# Altium PCB CirclePCBV2.PcbDoc
Units mil, origin at the board's own origin, x right, y up, seen from the top; angles counter-clockwise.
Board outline 6015.06 x 6015.03 mil, 4 copper layers (Top Layer, GND Plane, Power Plane, Bottom Layer), stack 38.58 mil thick; 9 components, 31 nets, 90 pads, 38 vias.
Unrouted connection lines stored in the file: 3.
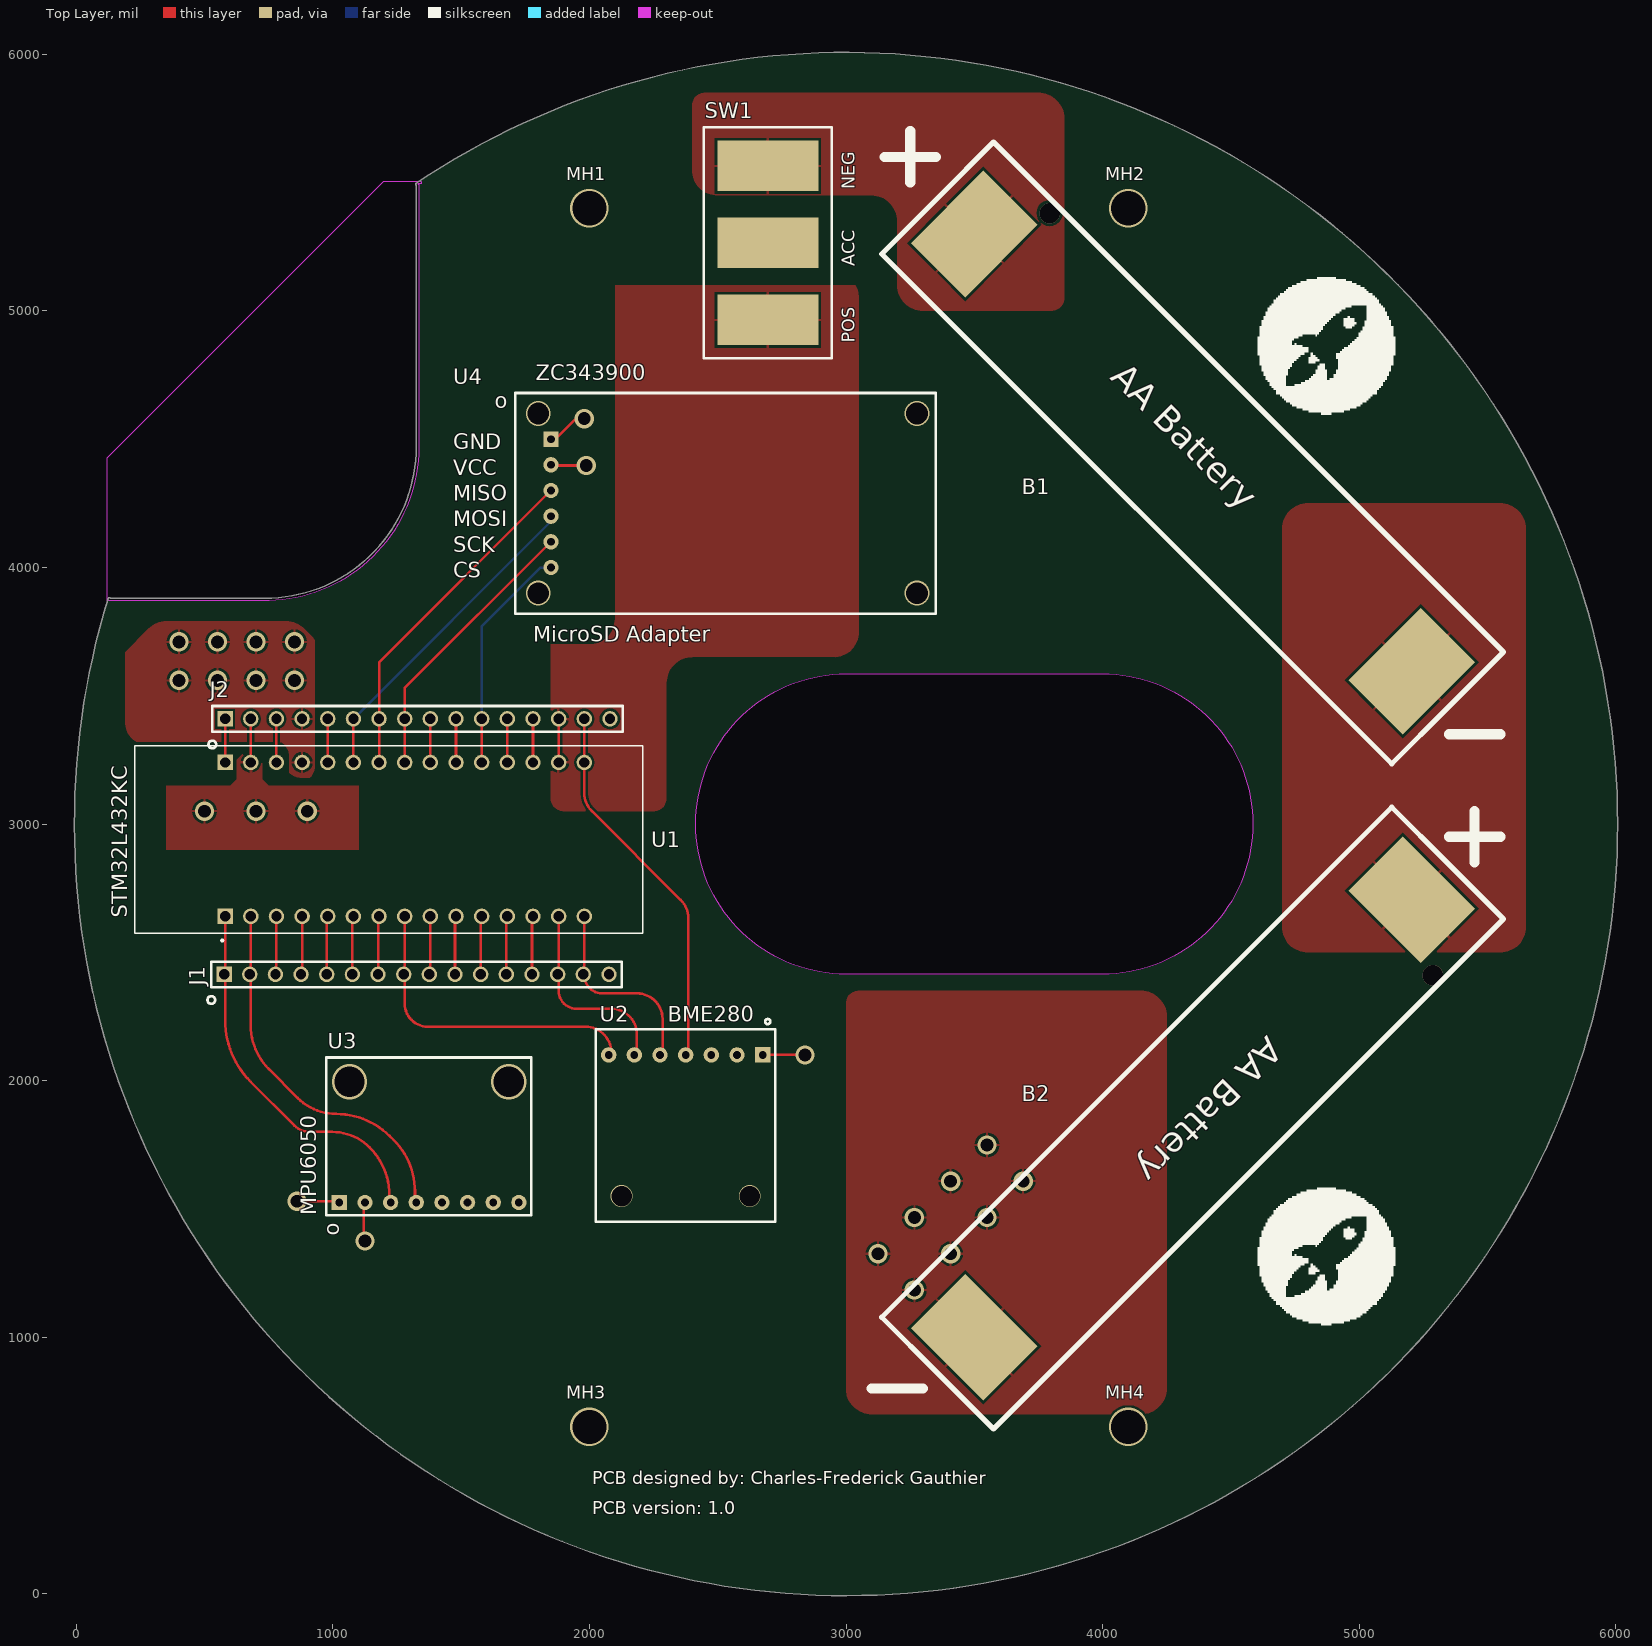
[diagram p0: Top Layer view]
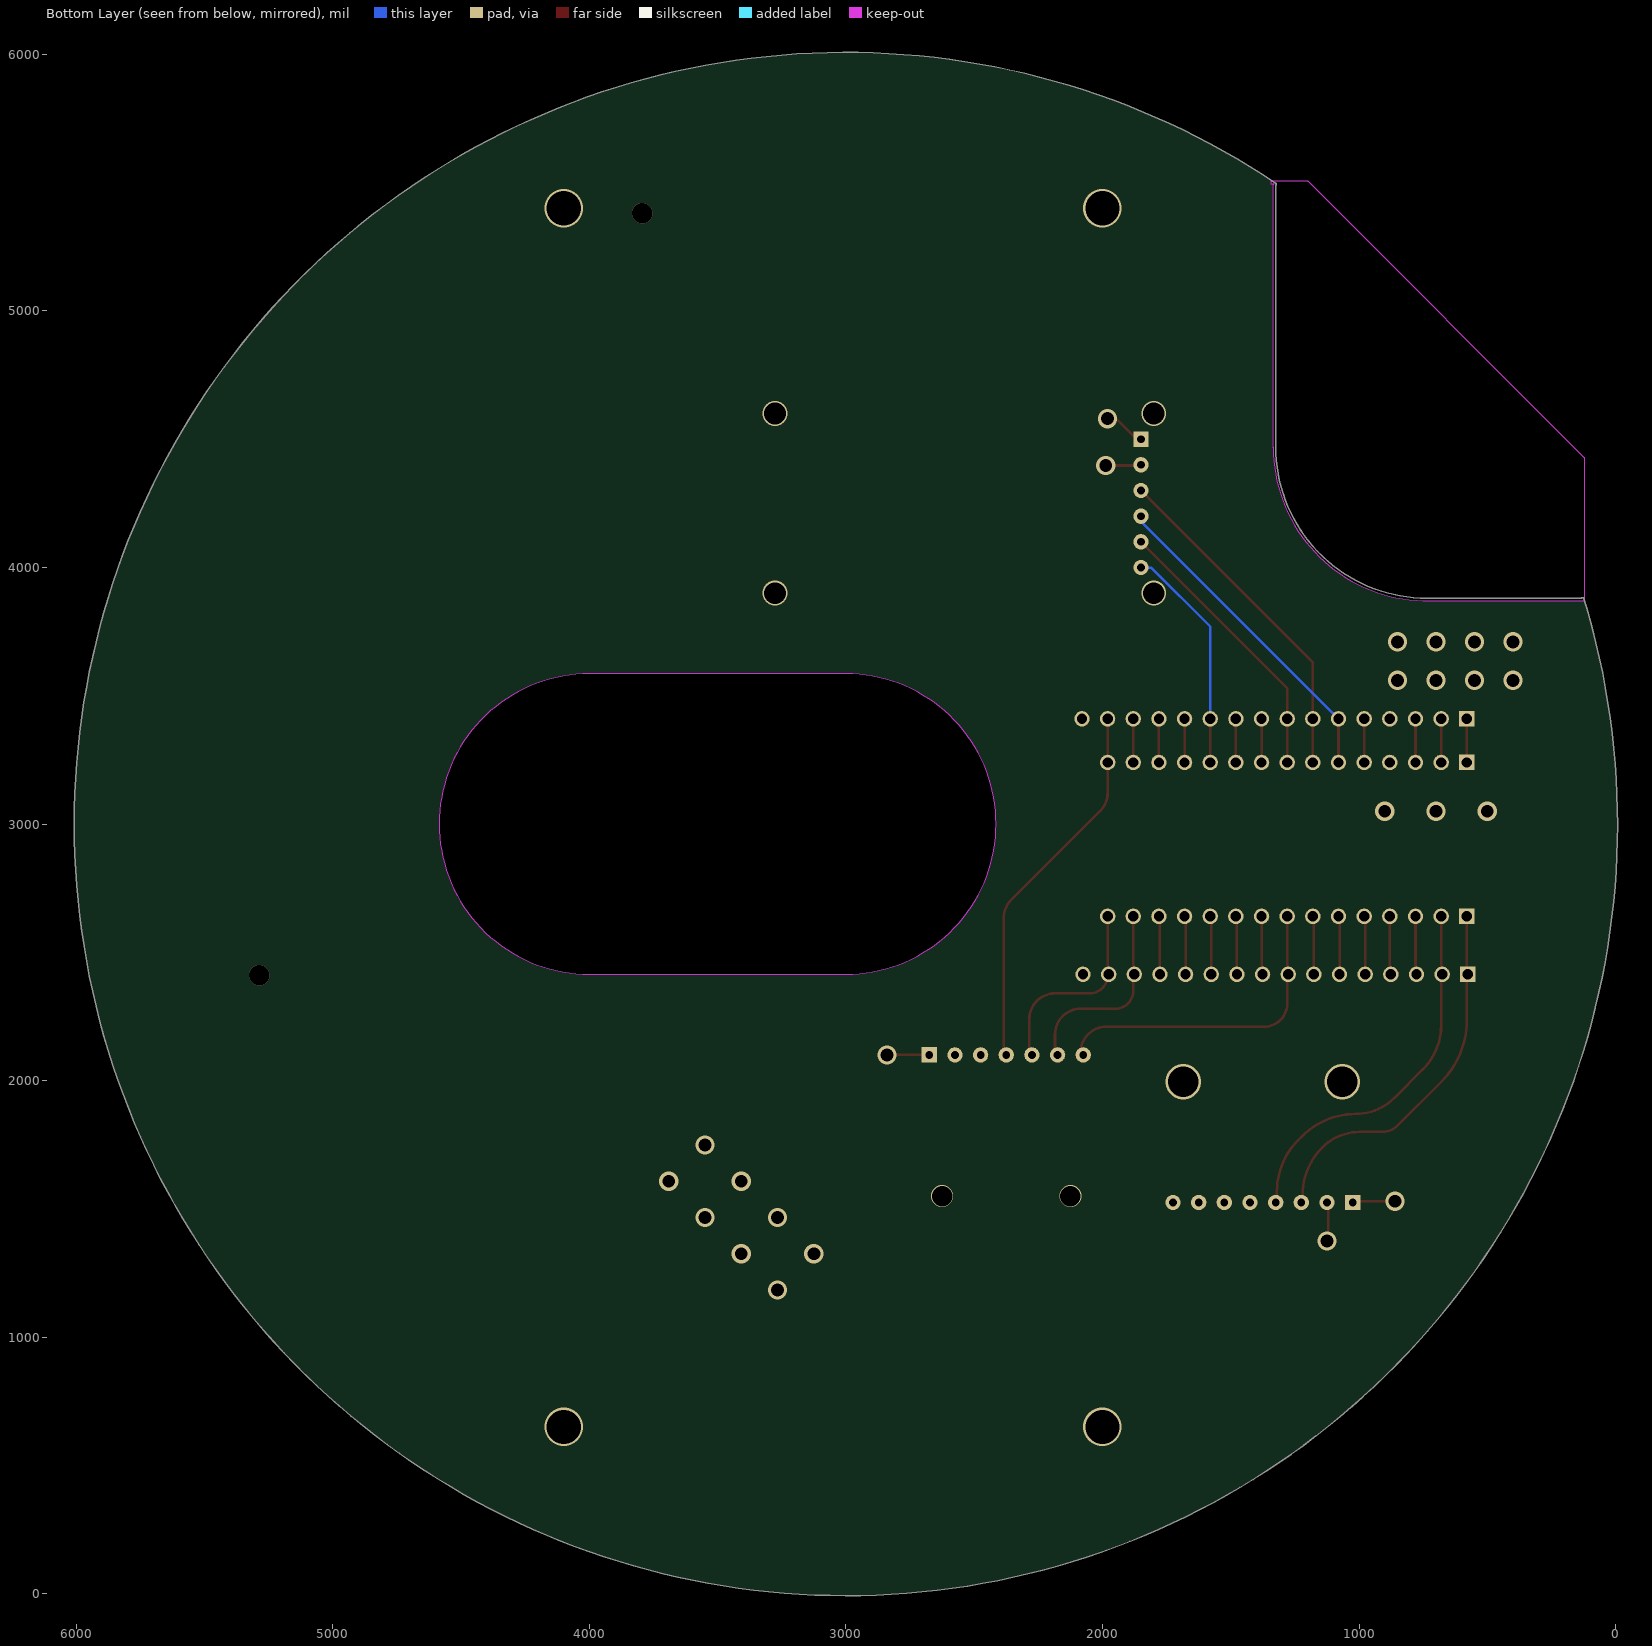
[diagram p1: Bottom Layer view, seen from below]
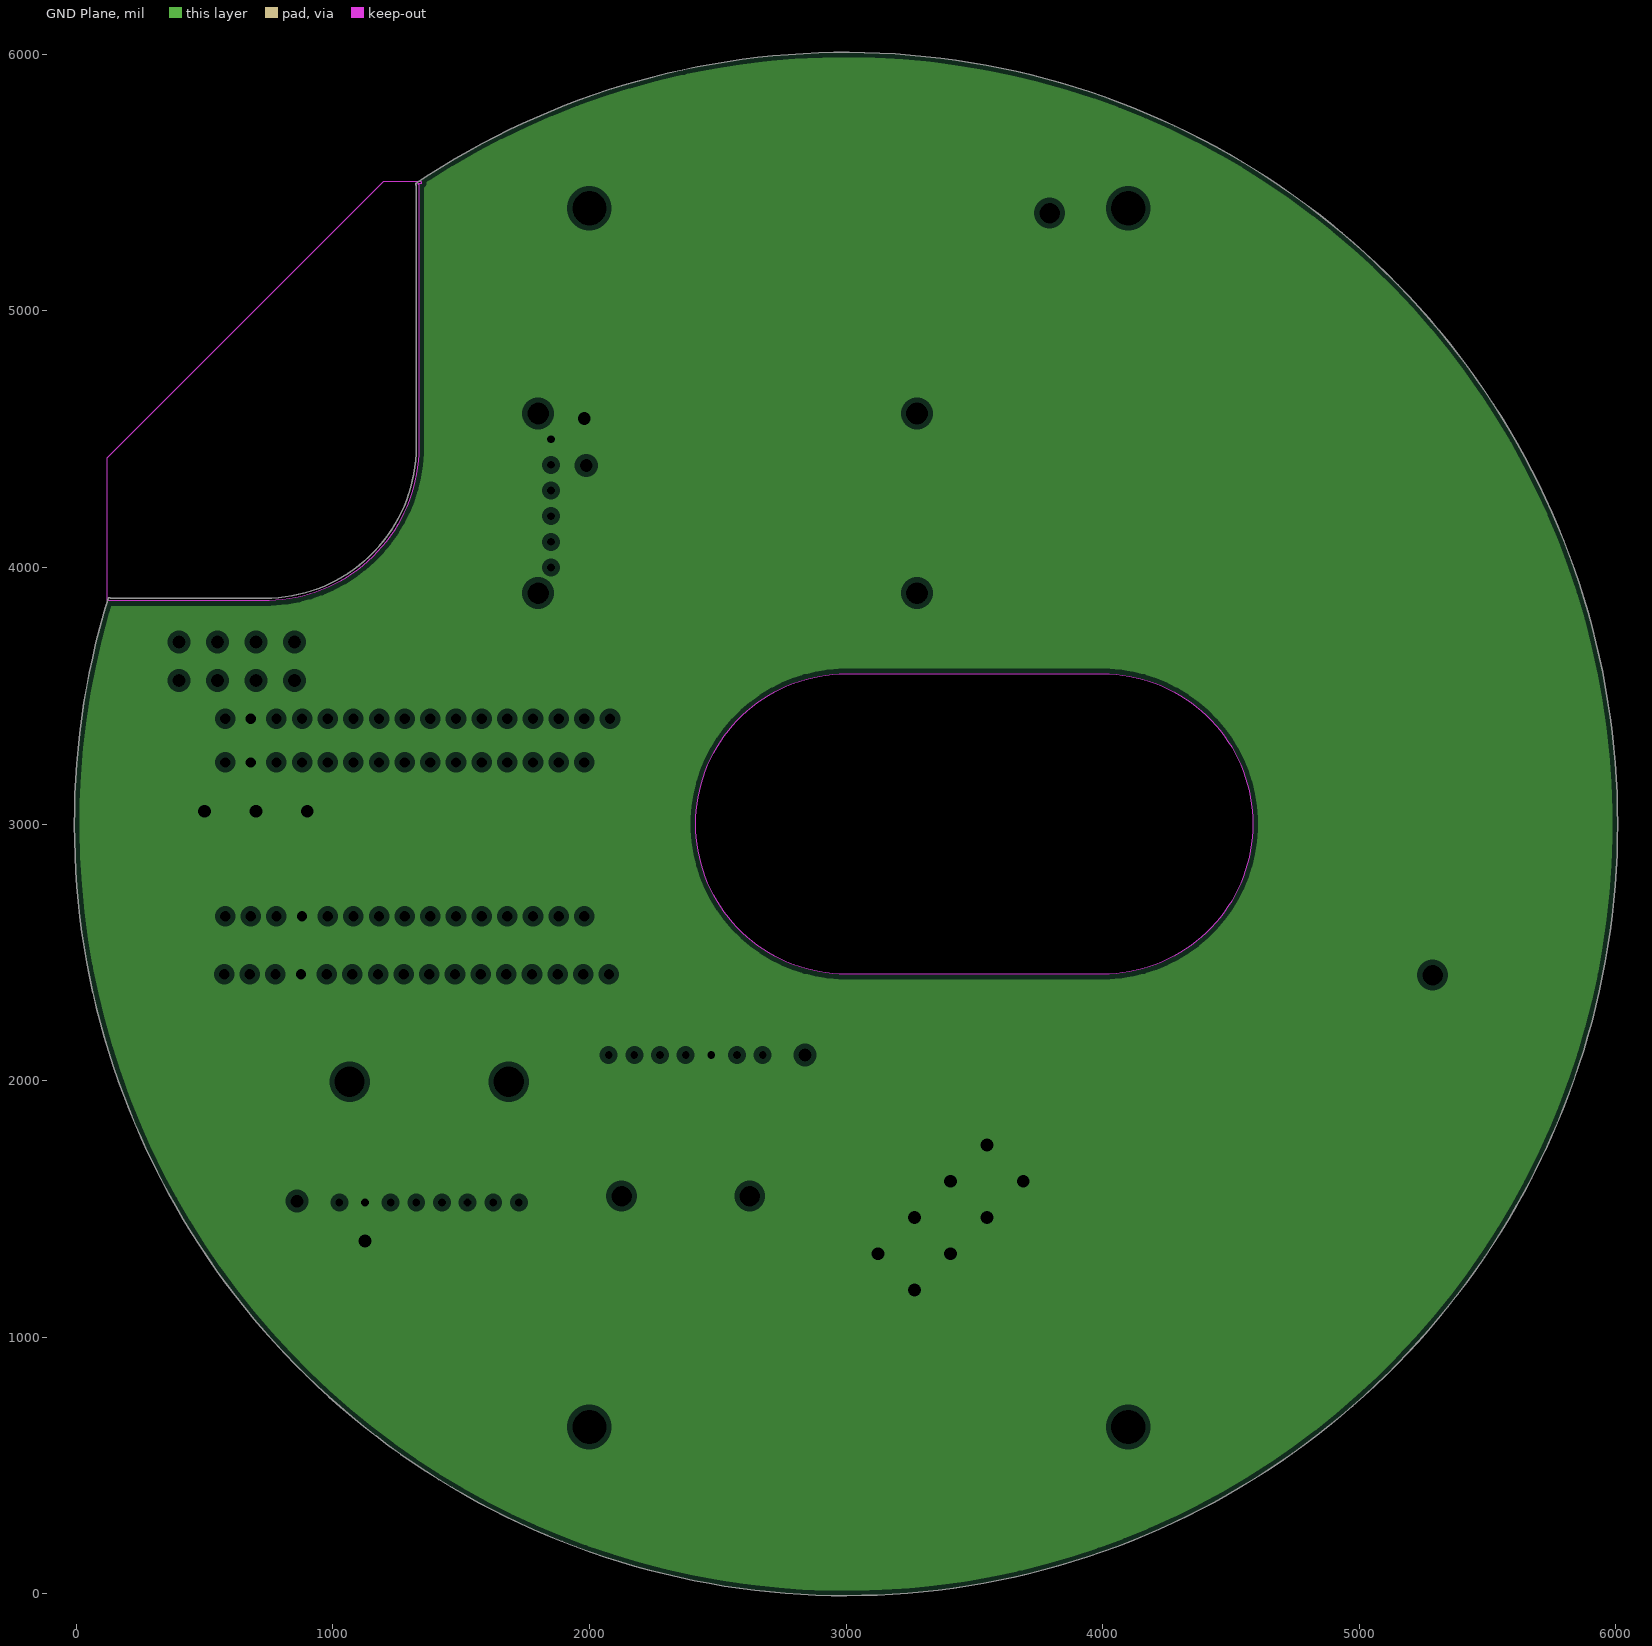
[diagram p2: GND Plane, clearances drawn from the general rule]
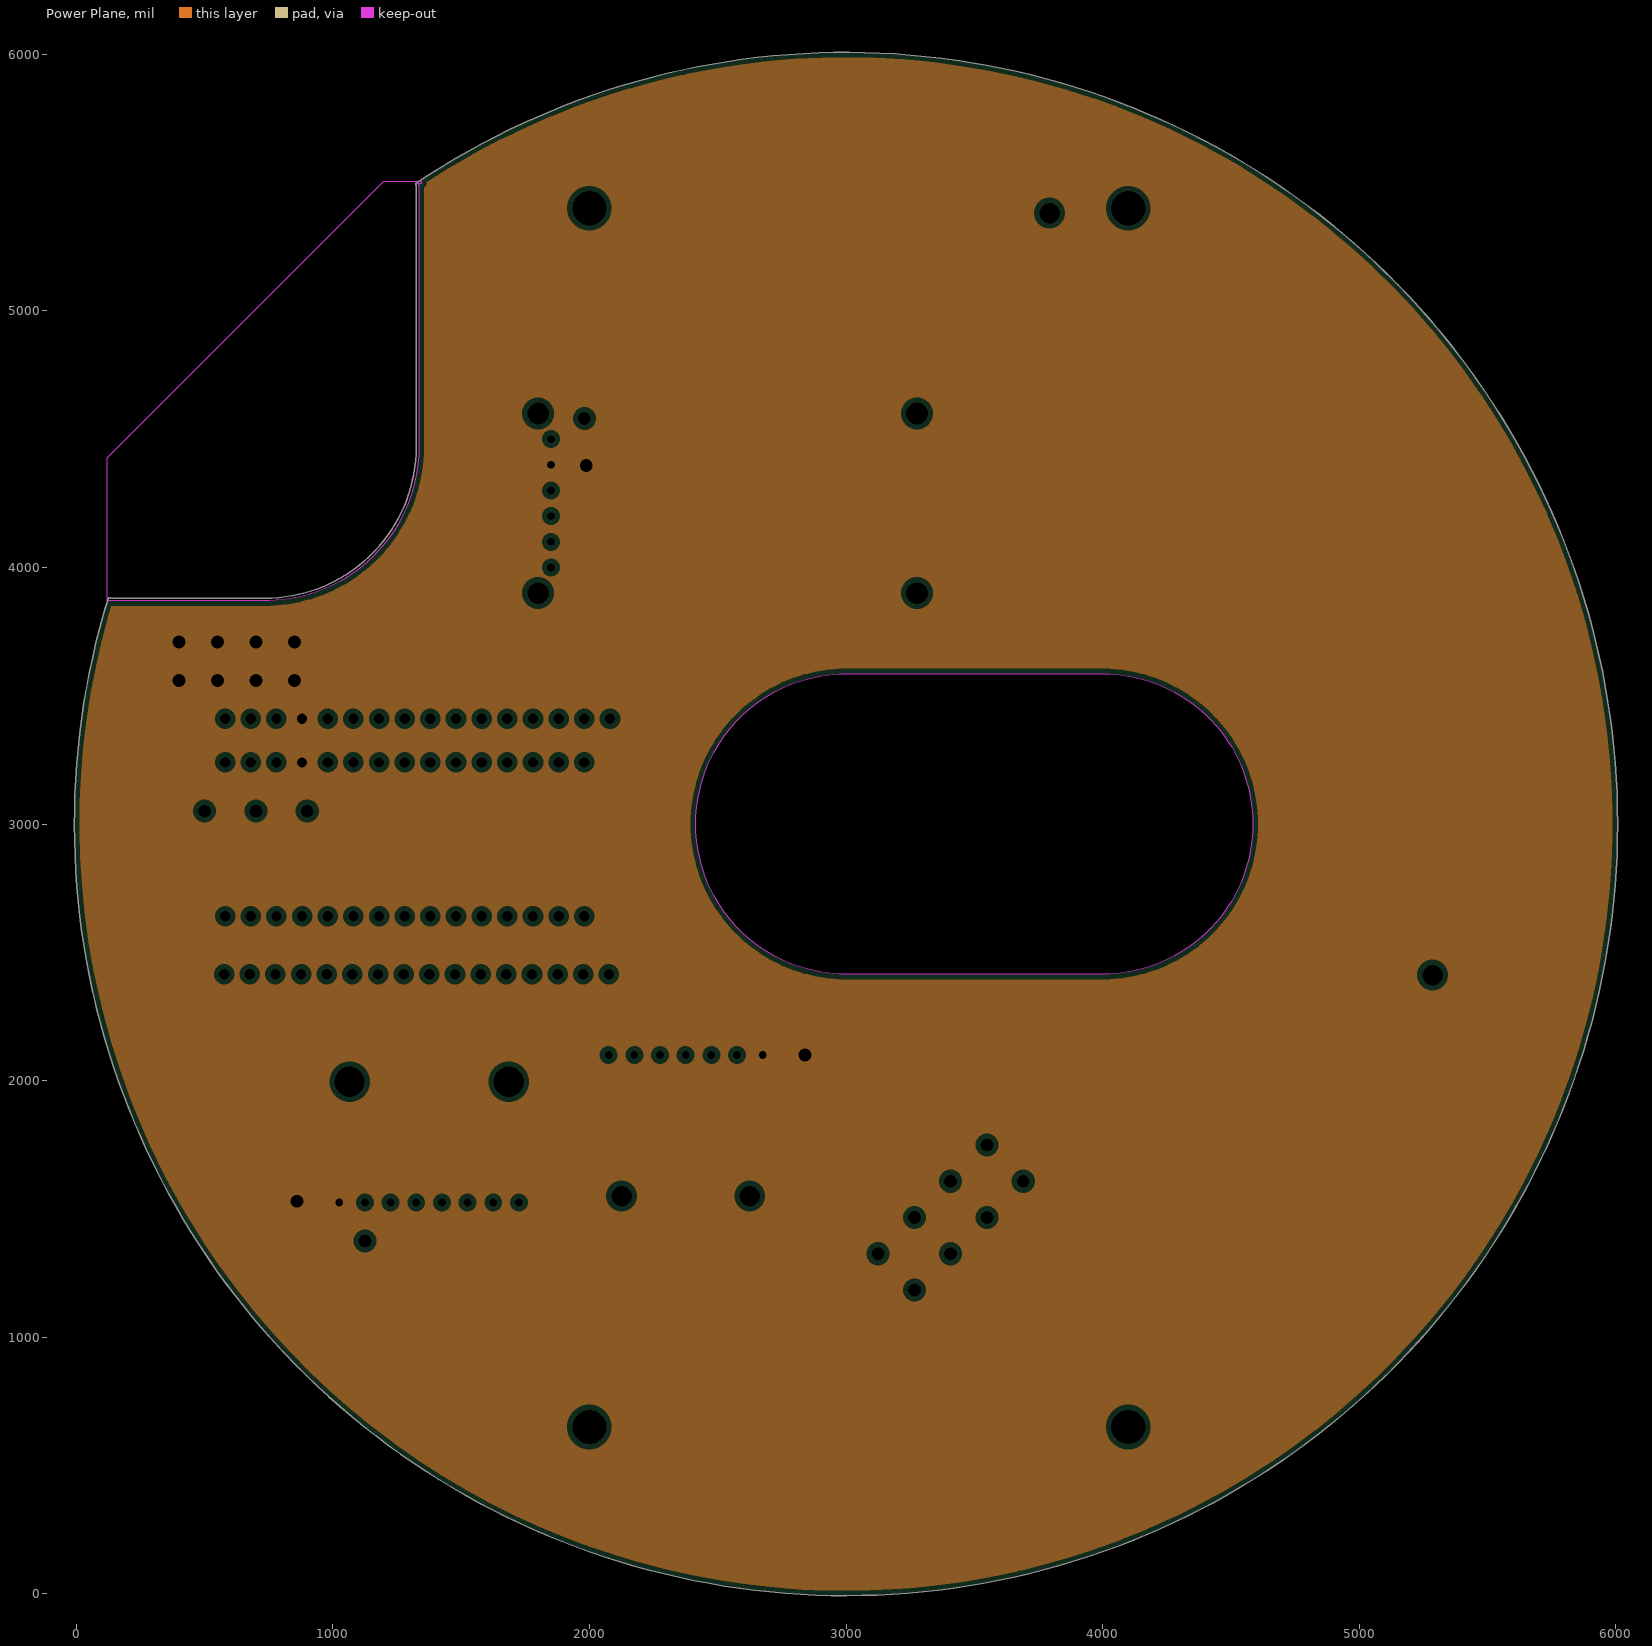
[diagram p3: Power Plane, clearances drawn from the general rule]

## Layer stack, top to bottom
Top Solder: solder mask 0.4, Solder Resist, Dk 3.5
Top Layer: signal copper 1.4
Dielectric 2: prepreg 10.19, PP-006, Dk 4.1
GND Plane: plane copper 1.4, net GND
Dielectric 1: dielectric 12.6, FR-4, Dk 4.8
Power Plane: plane copper 1.4, net 5V
Dielectric 3: prepreg 10.19, PP-006, Dk 4.1
Bottom Layer: signal copper 1.4
Bottom Solder: solder mask 0.4, Solder Resist, Dk 3.5

## Board outline
123.88,3879.32 cw(c128.68,3877.85) 133.2,3880.01 735,3880.01 ccw(c735,4470) 1324.98,4470 cw(c1330,4470) 1325.54,4472.29 1325.54,5489.03 cw(c1327.58,5493.61) 1324.78,5497.78 cw(c3000,3000) 6007.53,3000 cw(c3000,3000)
cut-out: 130,3869.99 cw(c130,3875) 127.5,3870.65 cw(c125,3875) 119.98,3875 119.98,4425 cw(c125,4425) 121.47,4428.56 121.45,4428.55 1196.45,5503.55 1196.44,5503.53 cw(c1200,5500) 1200,5505.02 1340,5505.02 cw(c1340,5500) 1345.02,5500 cw(c1340,5500) 1340,5494.98 1331.1,5494.98 cw(c1330.55,5490) 1335.57,5490 1335.57,4470 cw(c1330.55,4470) 1335.01,4467.71 cw(c735,4470) 751.49,3870.21 cw(c750,3875) 750,3869.99
cut-out: 3000,2414.46 cw(c3000,3000) 2999.97,3585.54 cw(c3000,3000) 3000,3585.54 4000.05,3585.54 cw(c4000,3000) 4585.54,3000 cw(c4000,3000) 4000.34,2414.46 cw(c4000,3000) 4000,2414.46 4000.34,2414.46

## Design rules (kind name [scope] priority, off if disabled: settings)
Clearance [All] p1: gap=10 ignorepadtopadclearanceinfootprint=FALSE except(0: Arc-Hole Track-Hole SMDPad-Hole THPad-Hole Via-Hole Fill-Hole Poly-Hole Region-Hole Text-Hole)
HoleSize [All] p1: absolutevalues=TRUE maxlimit=140 minlimit=1 maxpercent=80.000 minpercent=20.000
PlaneClearance [All] p1: clearance=20
PlaneConnect [All] p1: planeconnectstyle=Relief reliefexpansion=20 reliefentries=4 reliefconductorwidth=10 reliefairgap=10
PolygonConnect [All] p1: connectstyle=Relief reliefconductorwidth=10 reliefentries=4 polygonreliefangle="90 Angle" airgapwidth=10
RoomDefinition Power [InComponentClass('Power')] p1: confinementstyle=ConfineOut formatcopy=TRUE lockcomponents=FALSE outline 8270,3565 10270,3565 10270,4565 8270,4565
RoomDefinition STM32 [InComponentClass('STM32')] p2: confinementstyle=ConfineOut formatcopy=TRUE lockcomponents=FALSE outline 8250,2375 10250,2375 10250,3375 8250,3375
RoomDefinition Sensors [InComponentClass('Sensors')] p3: confinementstyle=ConfineOut formatcopy=TRUE lockcomponents=FALSE outline 8225,1125 10225,1125 10225,2125 8225,2125
RoomDefinition SD [InComponentClass('SD')] p4: confinementstyle=ConfineOut formatcopy=TRUE lockcomponents=FALSE outline 8250,0 10250,0 10250,1000 8250,1000
RoutingVias [All] p1: holewidth=28 width=50 viastyle="Through Hole" minholewidth=28 minwidth=50 maxholewidth=28 maxwidth=50
SolderMaskExpansion [All] p1: expansion=4 istentingtop=FALSE
Width [All] p1: maxlimit=10 minlimit=10 preferedwidth=10
27 further rules are at their usual default settings.

## Classes and differential pairs
component class Power: B1 B2 SW1
net class SD_SPI[3..0]: SD_SPI0 SD_SPI1 SD_SPI2 SD_SPI3
net class MPU6050_I2C[1..0]: MPU6050_I2C0 MPU6050_I2C1
net class BME280_SPI[3..0]: BME280_SPI0 BME280_SPI1 BME280_SPI2 BME280_SPI3
component class STM32: J1 J2 U1
component class Sensors: U2 U3
component class SD: U4

## Components (designator, comment, footprint, x,y, rotation, side; value= is the part's Value field where it differs from the comment)
B1 "BatteryHolder_AA" BATTERYHOLDER_AA 3500,5300 r315 top
B2 "BatteryHolder_AA" BATTERYHOLDER_AA 5204.83,2704.83 r225 top
J1 "16pin-MF-Connector" 16PIN-MF-CONNECTOR 576.02,2414.03 r90 top
J2 "16pin-MF-Connector" 16PIN-MF-CONNECTOR 580,3410 r90 top
SW1 "RR3130Switch" RR3130SWITCH 2695,4965 r90 top
U1 "STM32L432KC" STM32L432KC 218.39,2565 r90 top
U2 "BME280" BME280 2675,2100 r180 top
U3 "MPU6050" MPU6050 1025,1525 r90 top
U4 "ZC343900" ZC343900 1850,4500 r0 top

## Footprints (in the part's own frame and the unit in brackets; to place one, negate y for a bottom-side part, rotate by r counter-clockwise, add the part's x,y. Pads: shape width x height; smd on the part's side, far side on the other; paste and mask are expansions set on the pad)
16PIN-MF-CONNECTOR [mil]
  rect 60x60 hole 40.16: 1(0,0)
  round 60 hole 40.16: 2(0,-100) 3(0,-200) 4(0,-300) 5(0,-400) 6(0,-500) 7(0,-600) 8(0,-700) 9(0,-800) 10(0,-900) 11(0,-1000) 12(0,-1100) 13(0,-1200) 14(0,-1300) 15(0,-1400) 16(0,-1500)
  silkscreen extent -115,-1550 50,65
BATTERYHOLDER_AA [mil]
  rect 300x400 smd: 1(0,0) 2(2411,0)
  silkscreen extent -200,-310 2611,306
BME280 [mil]
  rect 60x60 hole 30: 1(0,0)
  round 60 hole 30: 2(100,0) 3(200,0) 4(300,0) 5(400,0) 6(500,0) 7(600,0)
  silkscreen extent -50,-140 650,650
MPU6050 [mil]
  rect 60x60 hole 30: 1(0,0)
  round 60 hole 30: 2(0,-100) 3(0,-200) 4(0,-300) 5(0,-400) 6(0,-500) 7(0,-600) 8(0,-700)
  silkscreen extent -50,-748 565,50
RR3130SWITCH [mm] "SWITCH ROCKER SPST 10A 125V"
  rect 5x10 smd: 1(0,0) 2(7.62,0) 3(15.24,0)
  silkscreen extent -3.81,-6.35 19.05,6.35
STM32L432KC [mm]
  rect 1.53x1.53 hole 1.02: CN3_1(1.905,-9.185) CN4_1(17.145,-9.185)
  round 1.53 hole 1.02: CN3_2(1.905,-11.725) CN3_3(1.905,-14.265) CN3_4(1.905,-16.805) CN3_5(1.905,-19.345) CN3_6(1.905,-21.885) CN3_7(1.905,-24.425) CN3_8(1.905,-26.965) CN3_9(1.905,-29.505) CN3_10(1.905,-32.045) CN3_11(1.905,-34.585) CN3_12(1.905,-37.125) CN3_13(1.905,-39.665) CN3_14(1.905,-42.205) CN3_15(1.905,-44.745) CN4_2(17.145,-11.725) CN4_3(17.145,-14.265) CN4_4(17.145,-16.805) CN4_5(17.145,-19.345) CN4_6(17.145,-21.885) CN4_7(17.145,-24.425) CN4_8(17.145,-26.965) CN4_9(17.145,-29.505) CN4_10(17.145,-32.045) CN4_11(17.145,-34.585) CN4_12(17.145,-37.125) CN4_13(17.145,-39.665) CN4_14(17.145,-42.205) CN4_15(17.145,-44.745)
  silkscreen extent -0.57,-50.54 18.79,-0.26
ZC343900 [mil] "MicroSD Adapter"
  rect 60x60 hole 30: 1(0,0)
  round 60 hole 30: 2(0,-100) 3(0,-200) 4(0,-300) 5(0,-400) 6(0,-500)
  silkscreen extent -140,-680 1500,180

## Part data
B1 B2: "Keystone Electronics 1088"
SW1: "SWITCH ROCKER SPST 10A 125V"
U4: "MicroSD Adapter"

## Via types
v1: diameter 75, hole 50, Top Layer to Bottom Layer, 24 vias
v2: diameter 96.46, hole 84.65, Top Layer to Bottom Layer, 4 vias
v3: diameter 150, hole 133.86, Top Layer to Bottom Layer, 4 vias
v4: diameter 80, hole 80, Top Layer to Bottom Layer, 2 vias
v5: diameter 137.8, hole 118.11, Top Layer to Bottom Layer, 2 vias
v6: diameter 85, hole 80, Top Layer to Bottom Layer, 2 vias

## Nets (pads, with @x,y where several pads share a name; then routed paths per layer and width w, separated by ;. In a path a pad name is that pad's centre, name@x,y a point inside that pad or via, vN(x,y) a via of type N, cw(c..) or ccw(c..) an arc to the next point about the centre after c; other vN are vias at no path point)
3V3: J2.14 SW1.1 U1.CN4_14 | length 170
  Top Layer w10: U1.CN4_14 J2.14
5V: J2.4 U1.CN4_4 U2.1 U3.1 U4.2 | length 488
  Top Layer w10: v1(860,1530) 1015,1530 1020,1525 U3.1@1045,1500 ; U4.2@1855,4405 1862.5,4397.5 v1(1987.5,4397.5) ; U2.1@2685,2100 v1(2840,2100)
  other v1: 400,3560 550,3560 700,3560 850,3560 400,3710 550,3710 700,3710 850,3710
BME280_SPI0: J2.15 U1.CN4_15 U2.4 | length 1940.4
  Top Layer w10: J2.15 U1.CN4_15 1980,3121.42 ; U2.4@2385,2100 2385,2633.58 ; 1980,3121.42 ccw(c2080,3121.42) 2009.29,3050.71 ; 1980,3121.42 ccw(c2080,3121.42) 2009.29,3050.71 ; 1980,3121.42 ccw(c2080,3121.42) 2009.29,3050.71 ; 1980,3121.42 ccw(c2080,3121.42) 2009.29,3050.71 ; 2009.29,3050.71 2355.71,2704.29 ; 2355.71,2704.29 cw(c2285,2633.58) 2385,2633.58 ; 2355.71,2704.29 cw(c2285,2633.58) 2385,2633.58 ; 2355.71,2704.29 cw(c2285,2633.58) 2385,2633.58 ; 2355.71,2704.29 cw(c2285,2633.58) 2385,2633.58
BME280_SPI1: J1.15 U1.CN3_15 U2.5 | length 1573.1
  Top Layer w10: U1.CN3_15 J1.15@1980,2410 ; U2.5@2285,2100 2285,2240 ; J1.15@1980,2410 ccw(c2050,2410) 2050,2340 ; J1.15@1980,2410 ccw(c2050,2410) 2050,2340 ; J1.15@1980,2410 ccw(c2050,2410) 2050,2340 ; J1.15@1980,2410 ccw(c2050,2410) 2050,2340 ; 2050,2340 2185,2340 ; 2185,2340 cw(c2185,2240) 2285,2240 ; 2185,2340 cw(c2185,2240) 2285,2240 ; 2185,2340 cw(c2185,2240) 2285,2240 ; 2185,2340 cw(c2185,2240) 2285,2240
BME280_SPI2: J1.14 U1.CN3_14 U2.6 | length 1573.1
  Top Layer w10: U1.CN3_14 1880,2350 ; U2.6@2185,2100 2185,2180 ; 1880,2350 ccw(c1950,2350) 1950,2280 ; 1880,2350 ccw(c1950,2350) 1950,2280 ; 1880,2350 ccw(c1950,2350) 1950,2280 ; 1880,2350 ccw(c1950,2350) 1950,2280 ; 1950,2280 2085,2280 ; 2085,2280 cw(c2085,2180) 2185,2180 ; 2085,2280 cw(c2085,2180) 2185,2180 ; 2085,2280 cw(c2085,2180) 2185,2180 ; 2085,2280 cw(c2085,2180) 2185,2180
BME280_SPI3: J1.8 U1.CN3_8 U2.7 | length 2158.8
  Top Layer w10: U1.CN3_8 1280,2300 ; U2.7@2085,2100 U2.7@2085,2110 ; 1280,2300 ccw(c1370,2300) 1370,2210 ; 1280,2300 ccw(c1370,2300) 1370,2210 ; 1280,2300 ccw(c1370,2300) 1370,2210 ; 1280,2300 ccw(c1370,2300) 1370,2210 ; 1370,2210 1985,2210 ; 1985,2210 cw(c1985,2110) U2.7@2085,2110 ; 1985,2210 cw(c1985,2110) U2.7@2085,2110 ; 1985,2210 cw(c1985,2110) U2.7@2085,2110 ; 1985,2210 cw(c1985,2110) U2.7@2085,2110
CN3_3: J1.3 U1.CN3_3 | length 228.2
  Top Layer w10: J1.3 ccw(c776.02,2418.01) 780,2418.01 U1.CN3_3
CN3_5: J1.5 U1.CN3_5 | length 228.2
  Top Layer w10: J1.5 976.02,2636.02 cw(c980,2636.02) U1.CN3_5
CN3_6: J1.6 U1.CN3_6 | length 228.2
  Top Layer w10: J1.6 1076.02,2636.02 cw(c1080,2636.02) U1.CN3_6
CN3_7: J1.7 U1.CN3_7 | length 228.2
  Top Layer w10: J1.7 1176.02,2636.02 cw(c1180,2636.02) U1.CN3_7
CN3_9: J1.9 U1.CN3_9 | length 228.2
  Top Layer w10: J1.9 ccw(c1376.02,2418.01) 1380,2418.01 U1.CN3_9
CN3_10: J1.10 U1.CN3_10 | length 228.2
  Top Layer w10: J1.10 1476.02,2636.02 cw(c1480,2636.02) U1.CN3_10
CN3_11: J1.11 U1.CN3_11 | length 228.2
  Top Layer w10: J1.11 1576.02,2636.02 cw(c1580,2636.02) U1.CN3_11
CN3_12: J1.12 U1.CN3_12 | length 228.2
  Top Layer w10: J1.12 1676.02,2636.02 cw(c1680,2636.02) U1.CN3_12
CN3_13: J1.13 U1.CN3_13 | length 228.2
  Top Layer w10: J1.13 1776.02,2636.02 cw(c1780,2636.02) U1.CN3_13
CN4_1: J2.1 U1.CN4_1 | length 170
  Top Layer w10: U1.CN4_1 J2.1
CN4_3: J2.3 U1.CN4_3 | length 170
  Top Layer w10: U1.CN4_3 J2.3
CN4_5: J2.5 U1.CN4_5 | length 170
  Top Layer w10: U1.CN4_5 J2.5
CN4_9: J2.9 U1.CN4_9 | length 170
  Top Layer w10: U1.CN4_9 J2.9
CN4_10: J2.10 U1.CN4_10 | length 170
  Top Layer w10: U1.CN4_10 J2.10
CN4_12: J2.12 U1.CN4_12 | length 170
  Top Layer w10: U1.CN4_12 J2.12
CN4_13: J2.13 U1.CN4_13 | length 170
  Top Layer w10: U1.CN4_13 J2.13
GND: B2.2 J1.4 J2.2 U1.CN3_4 U1.CN4_2 U2.3 U3.2 U4.1 | length 709.8
  Top Layer w10: U1.CN4_2 J2.2 ; J1.4 ccw(c876.02,2418.01) 880,2418.01 U1.CN3_4 ; U3.2@1120,1525 1120,1380 v1(1125,1375) ; U4.1@1855,4505 ccw(c1867.07,4517.07) 1867.07,4500 1947.07,4580 v1(1980,4580)
  other v1: 3266.42,1183.58 3125,1325 3407.84,1325 3266.42,1466.42 3549.26,1466.42 3407.84,1607.84 3690.69,1607.84 3549.26,1749.26 500,3050 700,3050 900,3050
MPU6050_I2C0: J1.1 U1.CN3_1 U3.3 | length 3567
  Top Layer w10: U1.CN3_1 580,2235.65 580,2235.59 ; U3.3@1220,1525 1220,1554.28 U3.3@1220,1554.34 ; 580,2235.59 ccw(c919.42,2235.59) 679.41,1995.59 ; 580,2235.59 ccw(c919.42,2235.59) 679.41,1995.59 ; 580,2235.59 ccw(c919.42,2235.59) 679.41,1995.59 ; 580,2235.59 ccw(c919.42,2235.59) 679.41,1995.59 ; 679.41,1995.59 679.47,1995.53 850,1825 ; 850,1825 ccw(c910.36,1885.36) 910.36,1800 ; 850,1825 ccw(c910.36,1885.36) 910.36,1800 ; 850,1825 ccw(c910.36,1885.36) 910.36,1800 ; 850,1825 ccw(c910.36,1885.36) 910.36,1800 ; 910.36,1800 997.62,1800 997.68,1800 ; 997.68,1800 cw(c997.68,1594.14) 1143.15,1739.8 ; 997.68,1800 cw(c997.68,1594.14) 1143.15,1739.8 ; 997.68,1800 cw(c997.68,1594.14) 1143.15,1739.8 ; 997.68,1800 cw(c997.68,1594.14) 1143.15,1739.8 ; 1143.15,1739.8 cw(c957.79,1554.34) U3.3@1220,1554.34 ; 1143.15,1739.8 cw(c957.79,1554.34) U3.3@1220,1554.34 ; 1143.15,1739.8 cw(c957.79,1554.34) U3.3@1220,1554.34 ; 1143.15,1739.8 cw(c957.79,1554.34) U3.3@1220,1554.34
MPU6050_I2C1: J1.2 U1.CN3_2 U3.4 | length 3884.4
  Top Layer w10: U1.CN3_2 680,2214.91 680,2214.85 ; 1237.44,1767.56 1237.57,1767.43 ; U3.4@1320,1525 1320,1568.25 1320,1568.32 ; 680,2214.85 ccw(c921.06,2214.85) 750.6,2044.4 ; 680,2214.85 ccw(c921.06,2214.85) 750.6,2044.4 ; 680,2214.85 ccw(c921.06,2214.85) 750.6,2044.4 ; 680,2214.85 ccw(c921.06,2214.85) 750.6,2044.4 ; 750.6,2044.4 750.66,2044.34 862.55,1932.45 862.6,1932.4 ; 862.6,1932.4 ccw(c1013.25,2083.06) 1013.25,1870 ; 862.6,1932.4 ccw(c1013.25,2083.06) 1013.25,1870 ; 862.6,1932.4 ccw(c1013.25,2083.06) 1013.25,1870 ; 862.6,1932.4 ccw(c1013.25,2083.06) 1013.25,1870 ; 1013.25,1870 1013.33,1870 ; 1013.33,1870 cw(c1013.25,1576.07) 1221.03,1783.97 ; 1013.33,1870 cw(c1013.25,1576.07) 1221.03,1783.97 ; 1013.33,1870 cw(c1013.25,1576.07) 1221.03,1783.97 ; 1013.33,1870 cw(c1013.25,1576.07) 1221.03,1783.97 ; 1221.03,1783.97 1221.16,1783.84 1237.57,1767.43 ; 1237.57,1767.43 cw(c1038.3,1568.32) 1320,1568.32 ; 1237.57,1767.43 cw(c1038.3,1568.32) 1320,1568.32 ; 1237.57,1767.43 cw(c1038.3,1568.32) 1320,1568.32 ; 1237.57,1767.43 cw(c1038.3,1568.32) 1320,1568.32
NetB1_1: B1.1 SW1.3
NetB1_2: B1.2 B2.1
SD_SPI0: J2.11 U1.CN4_11 U4.6 | length 902
  Top Layer w10: U1.CN4_11 J2.11
  Bottom Layer w10: J2.11 1580,3769.42 1810,3999.42 1849.42,3999.42 U4.6@1855,4005
SD_SPI1: J2.8 U1.CN4_8 U4.5 | length 1103.2
  Top Layer w10: U1.CN4_8 J2.8 1280,3530 U4.5@1855,4105
SD_SPI2: J2.7 U1.CN4_7 U4.3 | length 1344.6
  Top Layer w10: U1.CN4_7 J2.7 1180,3630 U4.3@1855,4305
SD_SPI3: J2.6 U1.CN4_6 U4.4 | length 1286
  Top Layer w10: U1.CN4_6 J2.6
  Bottom Layer w10: J2.6 1855,4185 U4.4@1855,4205
pads on no net: J1.16 J2.16 SW1.2 U2.2 U3.5 U3.6 U3.7 U3.8
copper on no net:
  other v2: 1800,3900 3276.38,3900 1800,4600 3276.38,4600
  other v3: 2000,650 4100,650 2000,5400 4100,5400
  other v4: 5286.15,2411.39 3793.45,5381.32
  other v5: 1065,1995 1685,1995
  other v6: 2125,1550 2625,1550

## Polygon pours and split planes (outlines as drawn)
GND on Top Layer "GND_L01_P028" (solid, pour order 28): 350,3150 350,2900 1100,2900 1100,3150 750,3150 725,3175 725,3275 650,3275 625,3250 625,3175 600,3150
5V on Top Layer "5V_L01_P026" (solid, pour order 26): 190,3670 190,3400 ccw(c286.57,3400) 218.28,3331.72 220,3330 ccw(c244.14,3354.14) 244.14,3320 785.86,3320 cw(c785.86,3285.86) 810,3310 cw(c761.72,3261.72) 830,3261.72 830,3200 ccw(c878.28,3248.28) 878.28,3180 910,3180 ccw(c861.72,3228.28) 930,3228.28 930,3705.86 ccw(c895.86,3705.86) 920,3730 889.29,3760.71 ccw(c818.58,3690) 818.58,3790 351.42,3790 ccw(c351.42,3690) 280.71,3760.71
GND on Top Layer "GND_L01_P011" (solid, pour order 11): 3000,800 ccw(c3100,800) 3100,700 4150,700 ccw(c4150,800) 4250,800 4250,2250 ccw(c4150,2250) 4150,2350 3050,2350 ccw(c3050,2300) 3000,2300
NetB1_1 on Top Layer "NETB1_1_L01_P009" (solid, pour order 9): 2500,5450 3100,5450 cw(c3100,5350) 3200,5350 3200,5100 ccw(c3300,5100) 3300,5000 3800,5000 ccw(c3800,5050) 3850,5050 3850,5750 ccw(c3750,5750) 3750,5850 2450,5850 ccw(c2450,5800) 2400,5800 2400,5550 ccw(c2500,5550)
NetB1_2 on Top Layer "NETB1_2_L01_P008" (solid, pour order 8): 5650,4150 ccw(c5550,4150) 5550,4250 4800,4250 ccw(c4800,4150) 4700,4150 4700,2600 ccw(c4800,2600) 4800,2500 5550,2500 ccw(c5550,2600) 5650,2600
3V3 on Top Layer "3V3_L01_P006" (solid, pour order 6): 2100,3800 cw(c2000,3800) 2000,3700 1850,3700 1850,3400 1850,3100 ccw(c1900,3100) 1900,3050 2250,3050 ccw(c2250,3100) 2300,3100 2300,3550 cw(c2400,3550) 2400,3650 2950,3650 ccw(c2950,3750) 3050,3750 3050,5050 ccw(c2950,5050) 3036.6,5100 2100,5100
GND on GND Plane (split plane): 258 vertices, not listed, extent 12.18,12.33 5987.43,5987.9
5V on Power Plane (split plane): 258 vertices, not listed, extent 12.18,12.33 5987.43,5987.9

## Silkscreen, mask and mechanical layers (free items; w line width, h text height)
Top Overlay:
  drawing of 12 lines, arcs and shapes, not listed
  text "MH1" at 1910,5510 h50
  text "MH2" at 4010,5510 h50
  text "MH3" at 1910,760 h50
  text "MH4" at 4010,760 h50
  text "PCB designed by: Charles-Frederick Gauthier" at 2010,426.66 h50
  text "PCB version: 1.0" at 2010,310 h50
Board Outline:
  lines w10: 128.68,3877.85 ccw(c3000,3000) 1327.58,5493.61 ; 130,3875 750,3875 ; 735,3875 ccw(c735,4470) 1330,4470 ; 1330.55,4470 1330.55,5490 ; 4000,2409.45 ccw(c4000,3000) 4000,3590.55 ; 4023.2,2409.45 3000,2409.45 cw(c3000,3000) 3000,3590.55 4023.2,3590.55
Components Outline:
  lines w10: 722.85,3880 723.4,3879.45

## Text inside footprints (layer, text, board x,y; h text height)
B1: Top Overlay "AA Battery" at 4025.61,4736.66 h100 r315
B2: Top Overlay "AA Battery" at 4641.5,2179.23 h100 r225
SW1: Top Overlay "POS" at 3035,4875 h50 r90; Top Overlay "NEG" at 3035,5475 h50 r90; Top Overlay "ACC" at 3035,5175 h50 r90
U3: Top Overlay "o" at 1025,1395 h60 r90
U4: Top Overlay "MicroSD Adapter" at 1780,3709.99 h60; Top Overlay "CS" at 1470,3960 h60; Top Overlay "SCK" at 1470,4060 h60; Top Overlay "MOSI" at 1470,4160 h60; Top Overlay "MISO" at 1470,4260 h60; Top Overlay "VCC" at 1470,4360 h60; Top Overlay "GND" at 1470,4460 h60; Top Overlay "o" at 1630,4620 h60